# EAGLE board ModbusGateway4GWiFi (EAGLE 9.6.2)
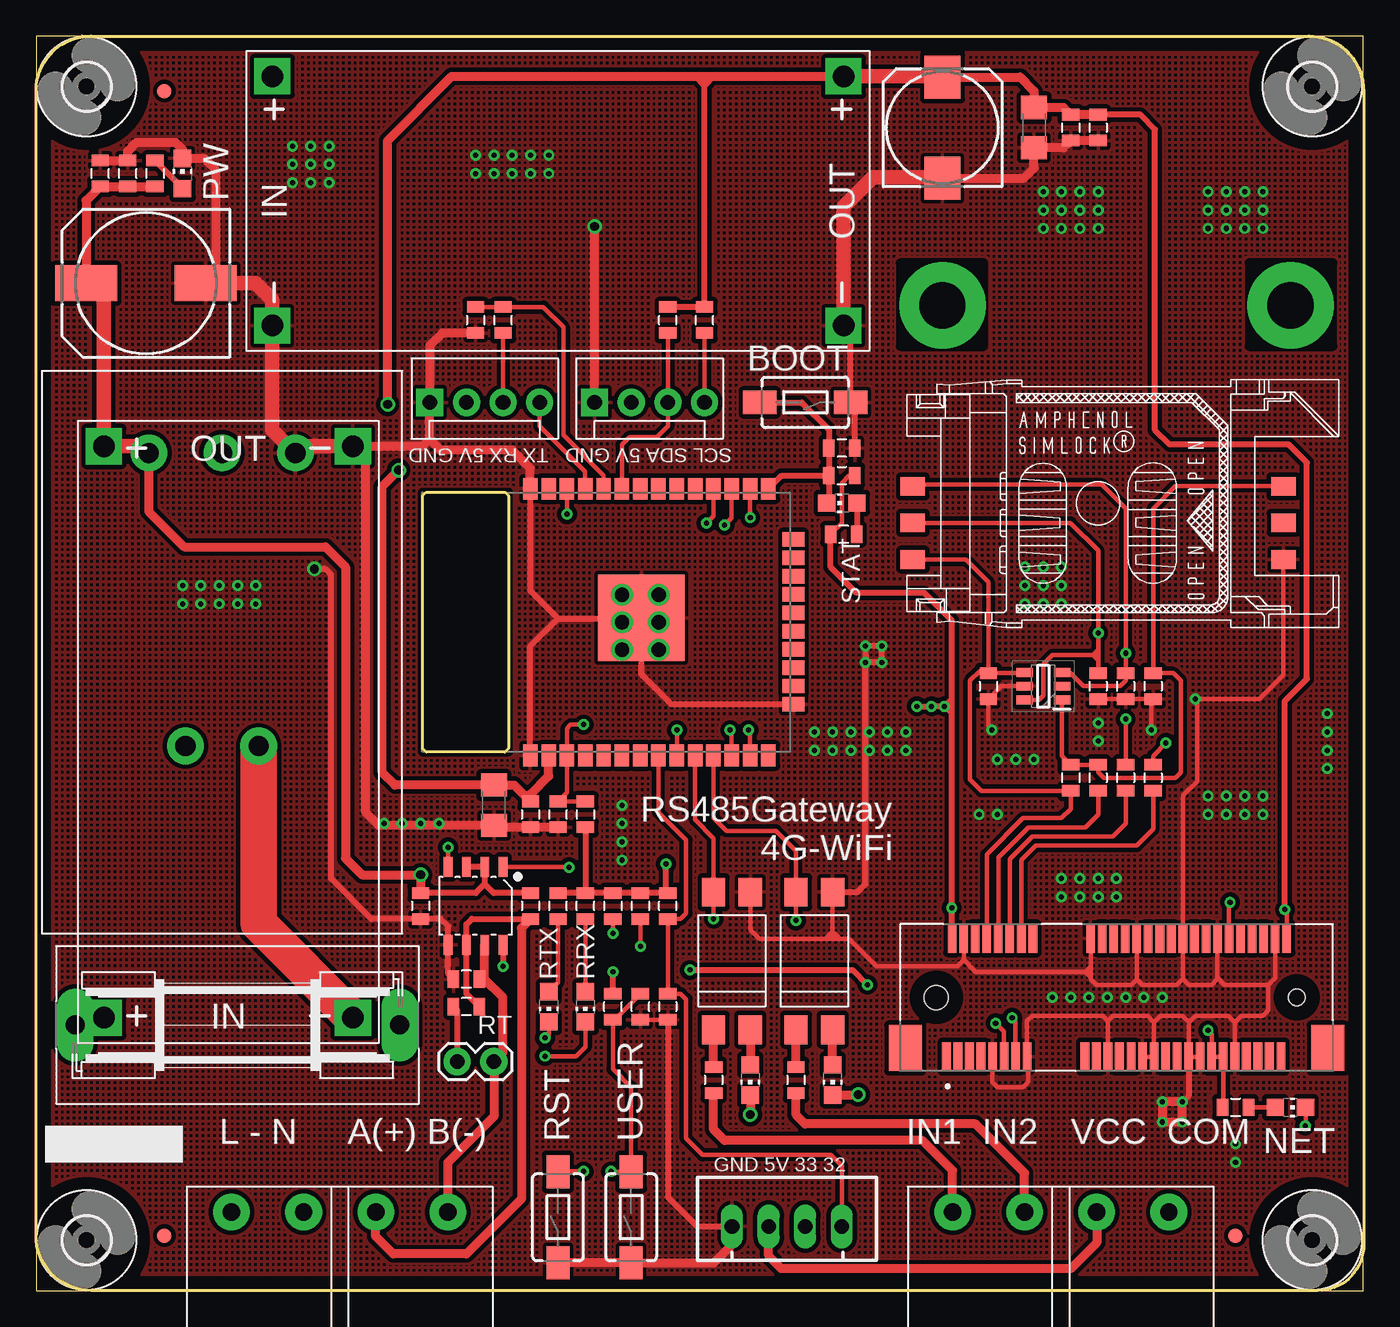
[diagram p0: board, top side]
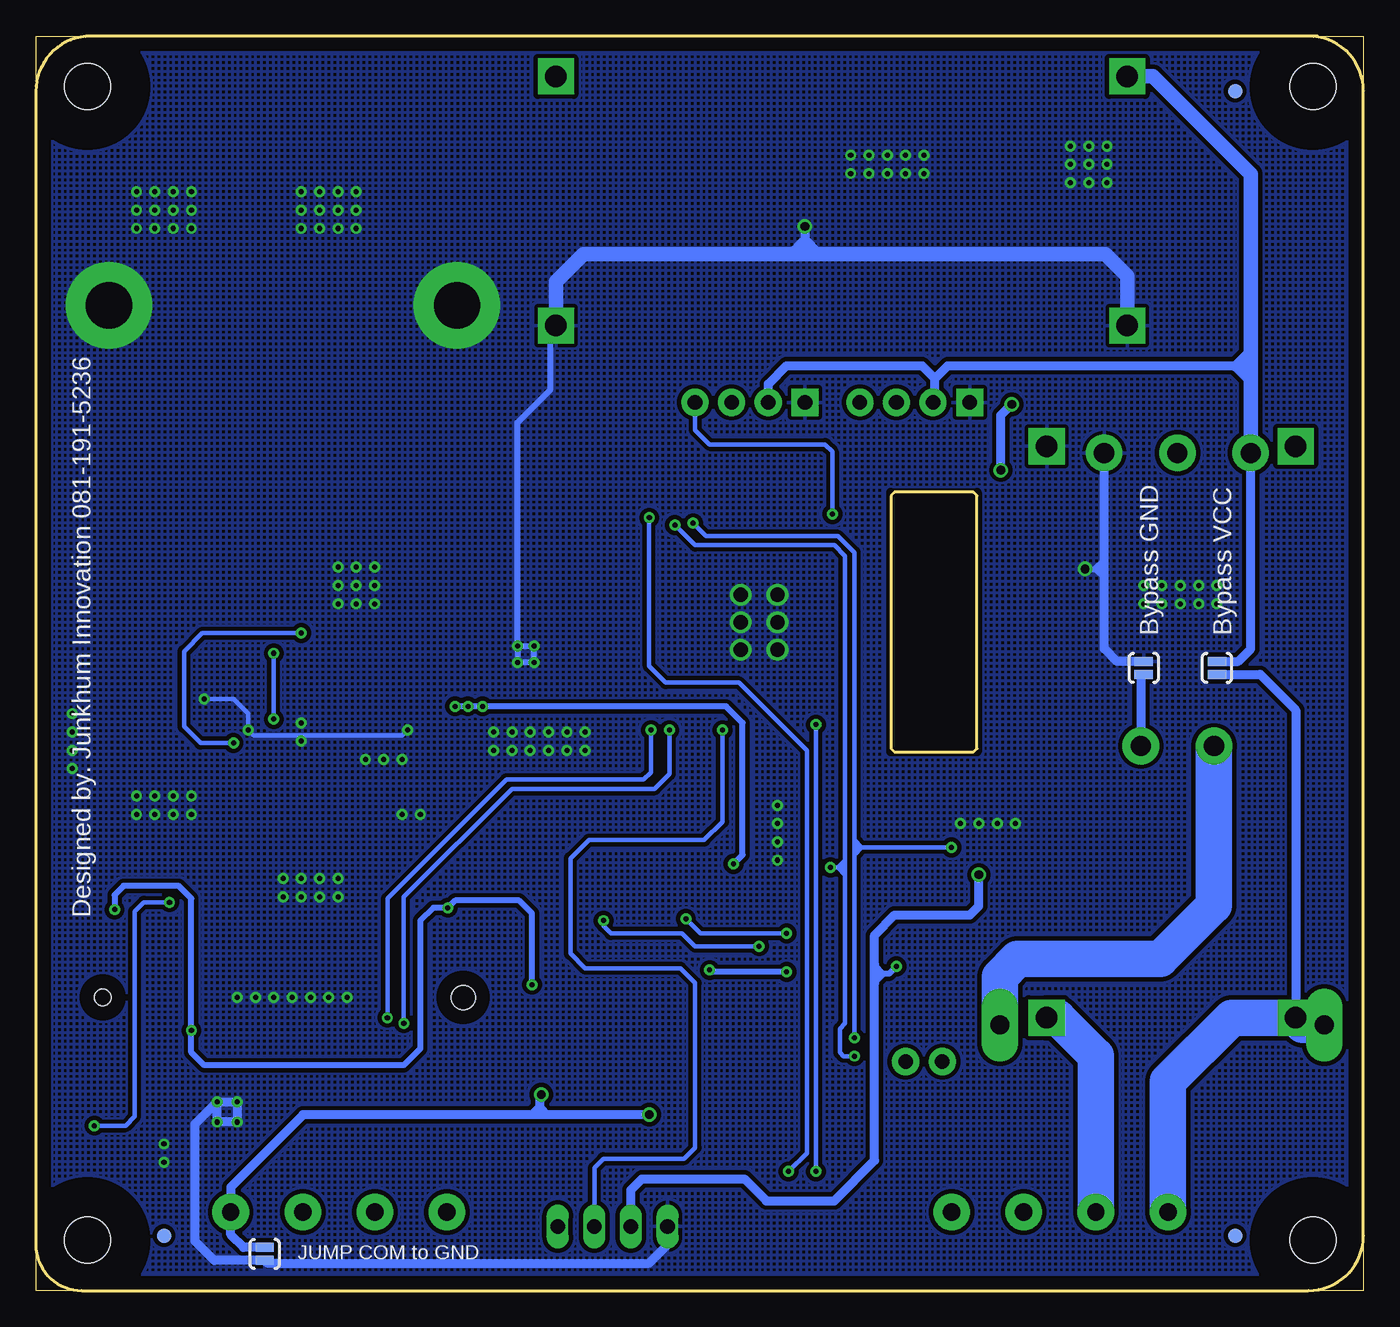
[diagram p1: board, bottom side, seen from below]

Size 92.06 x 87 mm. Coordinates in mm from the lower left corner, seen from the top.
Outline: 0,0 92.06,0 92.06,87 0,87 0,0
Copper layers (1*16): Top 0.035mm / dielectric 1.5mm / Bottom 0.035mm
Design rules "default *": minimum track width 6mil, minimum drill 0.35mm, track to track 6mil, track to pad 6mil, pad to pad 6mil, via to via 6mil, smd to smd 6mil, copper to edge 40mil, drill to drill 6mil, minimum pad ring 10mil, minimum via ring 8mil, stop-mask expansion 4mil, vias tented up to drill 25mil, thermal gap 10mil
Milling: 17 lines

## Footprints (pad centres in the part's own frame; a part is rotated, then mirrored left to right if it is on the bottom)
0805 = smd 0.8 x 1.2: 1 -0.9,0; 2 0.9,0
140CLH-1010 = smd 4.3 x 2.5: + 4.15,0; - -4.15,0
175TMP-0810 = smd 3 x 2.5: + 3.5,0; - -3.5,0
C1206 = smd 1.6 x 1.8: 1 -1.4,0; 2 1.4,0
SH22,5A = drill 1.321 pad 2.54 long: 1 -11.252,0; 2 11.252,0
SOT95P280X145-6N = smd 1.15 x 0.6: 1 -1.3,0.95; 2 -1.3,0; 3 -1.3,-0.95; 4 1.3,-0.95; 5 1.3,0; 6 1.3,0.95
MOLEX_67910-0002 = smd 0.6 x 2: 1 -11.8,-4.1; 2 -11.4,4.1; 3 -11,-4.1; 4 -10.6,4.1; 5 -10.2,-4.1; 6 -9.8,4.1; 7 -9.4,-4.1; 8 -9,4.1; 9 -8.6,-4.1; 10 -8.2,4.1; 11 -7.8,-4.1; 12 -7.4,4.1; 13 -7,-4.1; 14 -6.6,4.1; 15 -6.2,-4.1; 16 -5.8,4.1; 17 -2.2,-4.1; 18 -1.8,4.1; 19 -1.4,-4.1; 20 -1,4.1; 21 -0.6,-4.1; 22 -0.2,4.1; 23 0.2,-4.1; 24 0.6,4.1; 25 1,-4.1; 26 1.4,4.1; 27 1.8,-4.1; 28 2.2,4.1; 29 2.6,-4.1; 30 3,4.1; 31 3.4,-4.1; 32 3.8,4.1; 33 4.2,-4.1; 34 4.6,4.1; 35 5,-4.1; 36 5.4,4.1; 37 5.8,-4.1; 38 6.2,4.1; 39 6.6,-4.1; 40 7,4.1; 41 7.4,-4.1; 42 7.8,4.1; 43 8.2,-4.1; 44 8.6,4.1; 45 9,-4.1; 46 9.4,4.1; 47 9.8,-4.1; 48 10.2,4.1; 49 10.6,-4.1; 50 11,4.1; 51 11.4,-4.1; 52 11.8,4.1 | smd 2.3 x 3.2: S1 -14.65,-3.5; S2 14.65,-3.5 | hole 1.65: -12.5,0 | hole 1.15: 12.5,0
MOLEX-1X4 = drill 1.016 pad 1.88 square: 1 0,0 | drill 1.016 pad 1.88: 2 2.54,0; 3 5.08,0; 4 7.62,0
1X02 = drill 1.016 pad 1.88: 1 0,0; 2 2.54,0
SJ_2S-NO = smd 0.635 x 1.27: 1 -0.45,0; 2 0.45,0
FIDUCIAL-1X2 = smd 1 x 1: 1 0,0
CHIP-LED0805 = smd 1.2 x 1.2: A 0,-1.05; C 0,1.05
DIL4-SMD = smd 1.6 x 2: 1 -1.27,-4.77; 2 1.27,-4.77; 3 1.27,4.77; 4 -1.27,4.77
TACTILE-SWITCH-1101NE = smd 2.3 x 1.6: 1 -3.15,0; 2 3.15,0
ESP-WROOM-32 = smd 1.5 x 1: 1 -9.25,7; 2 -9.25,5.73; 3 -9.25,4.46; 4 -9.25,3.19; 5 -9.25,1.92; 6 -9.25,0.65; 7 -9.25,-0.62; 8 -9.25,-1.89; 9 -9.25,-3.16; 10 -9.25,-4.43; 11 -9.25,-5.7; 12 -9.25,-6.97; 13 -9.25,-8.24; 14 -9.25,-9.51; 25 9.25,-9.51; 26 9.25,-8.24; 27 9.25,-6.97; 28 9.25,-5.7; 29 9.25,-4.43; 30 9.25,-3.16; 31 9.25,-1.89; 32 9.25,-0.62; 33 9.25,0.65; 34 9.25,1.92; 35 9.25,3.19; 36 9.25,4.46; 37 9.25,5.73; 38 9.25,7 | smd 1 x 1.5: 15 -5.7,-11.25; 16 -4.43,-11.25; 17 -3.16,-11.25; 18 -1.89,-11.25; 19 -0.62,-11.25; 20 0.65,-11.25; 21 1.92,-11.25; 22 3.19,-11.25; 23 4.46,-11.25; 24 5.73,-11.25 | smd 6 x 6: GND 0.3,-0.7
HIECUBE = drill 1.4 pad 2.54: P$1 13,15.04; P$2 13,9.96; P$3 33.32,17.58; P$4 33.32,12.5; P$5 33.32,7.42
5EHDRC-2P = drill 1.2 pad 2.54: P$1 3.1,1.75; P$2 8.1,1.75
SOIC8-1.27-5X4MM = smd 0.6 x 1.4: 1 -1.905,-2.7; 2 -0.635,-2.7; 3 0.635,-2.7; 4 1.905,-2.7; 5 1.905,2.7; 6 0.635,2.7; 7 -0.635,2.7; 8 -1.905,2.7
DC-DC-STEP-DOWN-LM2596 = drill 1.5 pad 2.5 square: IN+ -19.812,8.636; IN- -19.812,-8.636; OUT+ 19.812,8.636; OUT- 19.812,-8.636
3,2 = hole 3.2: 0,0
C707_10M006_512_2 = smd 1.7 x 1.3: C1 -12.85,-3.915; C2 -12.85,-1.375; C3 -12.85,1.165; C5 12.85,-3.915; C6 12.85,-1.375; C7 12.85,1.165
JST-XH-04-PACKAGE-LONG-PAD = drill 1.016 long: 1 -3.81,0; 2 -1.27,0; 3 1.27,0; 4 3.81,0

## Placement (x,y rotation side)
C1  33pF  [0805]  73.66,41.91 270 top
C2  0.1  [0805]  6.35,77.47 90 top
C3  1000/10  [140CLH-1010]  7.62,69.85 180 top
C4  0.1uF  [0805]  43.81,19.68 270 top
C5  0.1  [0805]  41.91,19.68 90 top
C6  0.1  [0805]  4.45,77.47 90 top
C7  33pF  [0805]  71.75,80.64 270 top
C8  470uF  [175TMP-0810]  62.87,80.64 90 top
C10  0.1uF  [0805]  26.67,26.67 270 top
C11  0.1  [0805]  34.29,33.02 270 top
C12  0.1  [0805]  36.2,33.02 90 top
C13  0.1  [0805]  55.88,58.42 180 top
C14  10uF  [C1206]  69.22,80.64 270 top
C16  10uF  [C1206]  31.75,33.66 270 top
C17  0.1  [0805]  73.66,80.64 270 top
C20  0.1  [0805]  66.04,41.91 270 top
C22  33pF  [0805]  77.47,41.91 270 top
C23  33pF  [0805]  75.56,41.91 270 top
F1  [SH22,5A]  13.97,18.41 0 top
IC1  DALC208SC6  [SOT95P280X145-6N]  69.85,41.91 180 top
J1  67910-0002  [MOLEX_67910-0002]  74.93,20.32 0 top
J3  TxRx  [MOLEX-1X4]  27.3,61.59 0 top
J4  I2C  [MOLEX-1X4]  38.73,61.59 0 top
JP1  RT  [1X02]  31.75,15.88 180 top
JP4  Bypass GND  [SJ_2S-NO]  15.24,43.18 90 bottom
JP5  Bypass VCC  [SJ_2S-NO]  10.16,43.18 90 bottom
JP8  FIDUCIAL1X2  [FIDUCIAL-1X2]  8.89,83.19 0 top
JP9  FIDUCIAL1X2  [FIDUCIAL-1X2]  8.89,3.81 0 bottom
JP10  FIDUCIAL1X2  [FIDUCIAL-1X2]  83.19,3.81 0 bottom
JP11  FIDUCIAL1X2  [FIDUCIAL-1X2]  8.89,83.19 0 bottom
JP12  FIDUCIAL1X2  [FIDUCIAL-1X2]  8.89,3.81 0 top
JP16  FIDUCIAL1X2  [FIDUCIAL-1X2]  83.19,3.81 0 top
LED2  PW  [CHIP-LED0805]  10.16,77.47 0 top
LED3  NET  [CHIP-LED0805]  87,12.7 270 top
LED4  RRX  [CHIP-LED0805]  38.1,19.68 180 top
LED5  RTX  [CHIP-LED0805]  35.56,19.68 180 top
LED8  STAT  [CHIP-LED0805]  55.88,54.61 90 top
LED13  IN1  [CHIP-LED0805]  49.53,14.61 180 top
LED14  IN2  [CHIP-LED0805]  55.24,14.61 180 top
OK7  PC817  [DIL4-SMD]  48.26,22.86 0 top
OK8  PC817  [DIL4-SMD]  53.98,22.86 0 top
R1  120  [0805]  29.84,19.68 180 top
R2  1k  [0805]  8.26,77.47 270 top
R3  0  [0805]  73.66,35.56 270 top
R4  0  [0805]  75.56,35.56 270 top
R5  56k  [0805]  34.29,26.67 270 top
R6  0  [0805]  77.47,35.56 270 top
R7  330  [0805]  83.19,12.7 0 top
R8  1k  [0805]  32.38,67.31 90 top
R9  15k  [0805]  71.75,35.56 270 top
R10  10k  [0805]  43.81,26.67 90 top
R11  10k  [0805]  40.01,19.68 90 top
R12  56k  [0805]  29.84,21.59 180 top
R13  2k  [0805]  30.48,67.31 270 top
R15  10k  [0805]  38.1,33.02 270 top
R16  10k  [0805]  55.88,56.52 0 top
R20  10k  [0805]  46.35,67.31 90 top
R21  330  [0805]  38.1,26.67 90 top
R22  330  [0805]  36.2,26.67 90 top
R24  10k  [0805]  43.81,67.31 90 top
R36  10k  [0805]  40.01,26.67 270 top
R37  2.2k  [0805]  46.99,14.61 270 top
R38  10k  [0805]  41.91,26.67 270 top
R39  2.2k  [0805]  52.7,14.61 270 top
R73  330  [0805]  56.01,52.45 180 top
S1  USER  [TACTILE-SWITCH-1101NE]  41.27,5.08 90 top
S2  BOOT  [TACTILE-SWITCH-1101NE]  53.34,61.59 180 top
S4  RST  [TACTILE-SWITCH-1101NE]  36.2,5.08 90 top
SJ3  JUMP COM to GND  [SJ_2S-NO]  76.2,2.54 90 bottom
U2  ESP-WROOM-32  [ESP-WROOM-32]  41.27,46.35 90 top
U$1  HIECUBE  [HIECUBE]  25.4,24.77 90 top
U$2  220VAC/12VDC  [5EHDRC-2P]  21.66,7.2 180 top
U$3  In12  [5EHDRC-2P]  71.66,7.2 180 top
U$4  MAX13487  [SOIC8-1.27-5X4MM]  30.48,26.67 180 top
U$5  Com  [5EHDRC-2P]  81.66,7.2 180 top
U$6  DC LM2596 5V  [DC-DC-STEP-DOWN-LM2596]  13.34,38.73 90 top
U$7  DC LM2596 3.3V  [DC-DC-STEP-DOWN-LM2596]  36.2,75.56 0 top
U$8  RS485  [5EHDRC-2P]  31.66,7.2 180 top
U$15  [3,2]  3.5,3.5 0 top
U$16  [3,2]  88.5,3.5 0 top
U$17  [3,2]  88.5,83.5 0 top
U$18  [3,2]  3.5,83.5 0 top
X1  SIMLOCK-C707_10M006_512_2  [C707_10M006_512_2]  73.66,54.61 0 top
X3  Sense  [JST-XH-04-PACKAGE-LONG-PAD]  52.07,4.45 0 top

## Library data of the parts
C1 C2 C4-C7 C10-C13 C17 C20 C22 C23 = SparkFun-Passives
C3 C8 C14 C16 LED13 LED14 = adafruit
F1 = fuse
IC1 = SamacSys_Parts; DESCRIPTION: TVS Diode Array DALC208SC6 Octal, SOT-23 6-Pin; HEIGHT: 1.45mm; MANUFACTURER_NAME: STMicroelectronics; MANUFACTURER_PART_NUMBER: DALC208SC6; MOUSER_PART_NUMBER: 511-DALC208SC6; MOUSER_PRICE-STOCK: https://www.mouser.com/Search/Refine.aspx?Keyword=511-DALC208SC6
J1 = 67910-0002; AVAILABILITY: Warning; DESCRIPTION: 52 Position Female Connector PCI Express Mini Card Gold 0.031 (0.80mm) Black; MF: Molex; MP: 67910-0002; PACKAGE: None; PRICE: None; PURCHASE-URL: https://pricing.snapeda.com/search/part/67910-0002/?ref=eda
J3 J4 = SparkFun-Connectors
JP1 JP8-JP12 JP16 SJ3 = SparkFun
JP4 JP5 = SparkFun-Retired
LED2-LED5 LED8 = led
OK7 OK8 = optocoupler
R1-R13 R15 R16 R20-R22 R24 R36-R39 R73 = SparkFun-Resistors
S1 S2 S4 = SparkFun-Electromechanical; PROD_ID: SWCH-00815
U2 = esp32
U$1 = HICUBE
U$2 U$3 U$5 U$8 = ES-CONNECTOR
U$4 = TCS-MAXIM
U$6 U$7 = diy-modules
U$15-U$18 = holes
X1 = con-amphenol; OC_FARNELL: unknown; OC_NEWARK: unknown
X3 = Rembrandt Electronics - JST XH Connectors v1-0

## Nets
3.3V: C7.1 C8.+ C11.1 C14.1 C16.1 C17.1 J1.2 J1.39 J1.41 J1.52 R7.1 R10.2 R11.2 R15.2 R16.2 R20.2 R21.2 R22.2 R24.2 R36.1 R38.1 R73.2 U2.2 U$7.OUT+
A(+): R1.1 R5.2 U$4.6 U$8.P$2
B(-): JP1.1 R12.1 U$4.7 U$8.P$1
COM: LED13.C LED14.C SJ3.2 U$5.P$1
EN: C12.2 R15.1 S4.2 U2.3
GND: C1.2 C2.2 C3.- C4.2 C5.1 C6.2 C7.2 C8.- C10.2 C11.2 C12.1 C13.1 C14.2 C16.2 C17.2 C20.2 C22.2 C23.2 IC1.5 J1.4 J1.9 J1.15 J1.18 J1.21 J1.26 J1.27 J1.29 J1.34 J1.35 J1.37 J1.40 J1.43 J1.50 J3.1 J4.1 JP4.2 LED2.C OK7.3 OK8.3 R12.2 R13.2 S1.1 S2.1 S4.1 SJ3.1 U2.1 U2.15 U2.38 U2.GND U$1.P$5 U$4.5 U$6.OUT- U$7.IN- U$7.OUT- X1.C5 X3.1
GPIO0: C13.2 LED8.C R16.1 S2.2 U2.25
GPIO2: U2.24
GPIO4: C5.2 R11.1 S1.2 U2.26
GPIO5: U2.29
GPIO12: U2.14
GPIO13: U2.16
GPIO14: J1.13 U2.13
GPIO15: U2.23
GPIO18: U2.30
GPIO19: U2.31
GPIO23: U2.37
GPIO25: OK7.4 R36.2 U2.10
GPIO26: OK8.4 R38.2 U2.11
GPIO27: J1.11 U2.12
GPIO32: C4.1 R10.1 U2.8 X3.4
GPIO33: U2.9 X3.3
GPIO34: U2.6
GPIO35: U2.7
GPIO36: U2.4
GPIO39: U2.5
N$1: JP1.2 R1.2
N$3: J1.10 R3.2
N$5: JP4.1 U$1.P$2 U$2.P$1 U$6.IN-
N$6: LED2.A R2.1
N$7: J1.12 R4.2
N$8: J3.3 R8.1
N$10: J1.14 R6.2
N$14: J1.42 LED3.C
N$15: LED3.A R7.2
N$26: F1.2 U$1.P$1
N$48: LED4.A R21.1
N$49: LED5.A R22.1
N$54: LED8.A R73.1
N$60: OK7.1 R37.1
N$62: LED13.A OK7.2
N$63: OK8.1 R39.1
N$65: LED14.A OK8.2
N$68: R37.2 U$3.P$2
N$71: R39.2 U$3.P$1
RX0: R8.2 R13.1 U2.34
RX2: LED4.C U2.27 U$4.1
S_CLK: C23.1 IC1.3 R4.1 X1.C3
S_DATA: C22.1 IC1.1 R3.1 R9.1 X1.C7
S_RST: C1.1 IC1.6 R6.1 X1.C2
S_VSIM: C20.1 IC1.4 J1.8 R9.2 X1.C1
SCL: J4.4 R20.1 U2.36
SDA: J4.3 R24.1 U2.33
TX0: J3.4 U2.35
TX2: LED5.C U2.28 U$4.4
VCC: C2.1 C3.+ C6.1 C10.1 J3.2 J4.2 JP5.2 R2.2 R5.1 U$1.P$3 U$4.2 U$4.3 U$4.8 U$5.P$2 U$6.OUT+ U$7.IN+ X3.2
VS: F1.1 JP5.1 U$2.P$2 U$6.IN+

## Tracks (layer width: path | path; a pad name or v marks a point on that pad's centre or on a via)
3.3V  (via drill 0.35, 0.6)
  Top 0.305: R73.2 55.88,53.22 55.88,56.01 56.39,56.52 R16.2 | R7.1 82.33,12.74 J1.41 J1.39 81.53,17.78 v81.28,18.03 | J1.52 86.73,26.3 v86.61,26.42
  Top 0.406: R21.2 R36.1 R38.1 R10.2 43.69,27.7 v43.69,29.59 | R21.2 R22.2 | R24.2 R20.2 46.35,83.57 | v86.61,26.42 86.61,40.89 88.14,42.42 88.14,57.4 86.87,58.67 78.61,58.67 77.6,59.69 77.6,80.52 76.57,81.55 C17.1 | J1.2 63.53,26.51 v63.5,26.54 63.5,40.01 | R11.2 v40.01,22.1 | v45.34,22.23 56.64,22.23 v57.66,21.21 | 63.5,40.01 63.5,40.64 | 63.5,40.64 63.5,41.02 | 63.5,41.02 63.5,46.48 61.59,48.39 56.9,48.39 55.11,50.18 R73.2 | v61.09,40.51 v62.1,40.51 v62.99,40.51 | v62.99,40.51 63.12,40.64 63.5,40.64 | v62.99,40.51 63.5,41.02 | v62.99,40.51 63.5,40.01 | R15.2 R21.2 | 46.23,84.2 46.35,84.07 46.35,83.57 | 45.72,84.2 46.35,83.57 | 46.35,83.57 46.99,84.2
  Top 0.61: U2.2 35.55,35.67 34.29,34.42 C11.1 33.16,35.05 C16.1 24.89,35.05 24,35.94 24,55.75 v25.15,56.9 | C17.1 C7.1 71.25,82.05 C14.1 69.22,83.19 68.25,84.14 C8.+ | v24.38,61.47 24.38,79.76 28.83,84.2 45.72,84.2 46.23,84.2 46.99,84.2 U$7.OUT+
  Top 1.016: U$7.OUT+ 62.81,84.2 C8.+
  Bottom 0.406: v86.61,26.42 86.61,27.43 85.98,28.07 82.17,28.07 81.28,27.18 v81.28,18.03 81.28,16.51 80.39,15.62 66.55,15.62 65.41,16.76 65.41,25.65 64.52,26.54 v63.5,26.54 62.99,27.05 58.55,27.05 57.66,26.16 v57.66,21.21 | v40.01,22.1 45.21,22.1 v45.34,22.23 | v43.69,29.59 43.05,30.23 43.05,39.37 44.2,40.51 v61.09,40.51 v62.1,40.51 v62.99,40.51
  Bottom 0.61: v25.15,56.9 25.15,60.71 v24.38,61.47
A(+)
  Top 0.406: R5.2 30.23,25.78 29.84,25.4 U$4.6 29.84,20.59 R1.1
  Top 0.61: R5.2 33.66,25.14 33.66,6.35 29.84,2.54 24.77,2.54 23.56,3.75 U$8.P$2
B(-)
  Top 0.406: JP1.1 32,16.13
  Top 0.61: U$8.P$1 28.56,8.87 31.75,12.06 JP1.1 32.38,16.51 32.38,20.32 31.11,21.59 | 31.11,21.59 U$4.7 | R12.1 31.11,21.59
COM  (via drill 0.6)
  Top 0.61: LED13.C v49.53,12.19 | LED14.C 56.99,13.55 v57.02,13.59
  Bottom 0.61: v49.53,12.19 56.64,12.19 | 56.64,12.19 57.15,12.19 | 57.15,12.19 57.66,12.19 | SJ3.2 77.67,2.99 78.56,3.88 U$5.P$1 78.56,7.17 73.53,12.19 57.78,12.19 57.66,12.19 | v57.02,13.59 57.15,13.46 57.15,12.7 | 57.15,12.7 57.15,12.19 | 57.15,12.7 56.64,12.19 | 57.15,12.7 57.66,12.19
EN  (via drill 0.35)
  Top 0.305: R15.1 C12.2 36.81,34.54 U2.3 36.81,38.97 37.08,39.24 v37.97,39.24 | S4.2 36.22,8.26 v37.97,8.26
  Bottom 0.305: v37.97,8.26 v37.97,39.24
GND  (via drill 0.35, 0.6, 1, 3.2 pad 6)
  Top 0.305: J1.43 83.13,18.6 | 79.93,18.59 J1.35 J1.37 | 83.13,18.6 82.68,19.05 80.39,19.05 79.93,18.59 | J1.27 J1.29 77.53,18.61 | J1.21 74.33,18.7 | 74.33,18.7 74.68,19.05 77.09,19.05 77.53,18.61 | J1.9 66.33,14.44 66.67,14.1 68.45,14.1 68.83,14.48 68.83,16.12 J1.15 68.73,18.69 69.09,19.05 73.98,19.05 74.33,18.7 | 72.77,22.1 65.15,22.1 64.33,22.92 J1.4 64.33,22.93 63.88,22.48 58.29,22.48 56.39,24.38 55.75,24.38 | 73.15,22.1 72.77,22.1 | 73.15,21.72 73.15,21.59 73.53,21.21 75.95,21.21 76.33,21.59 | 73.15,21.72 73.15,22.1 | 73.15,22.1 73.15,22.48 | 73.15,22.48 73.15,24.4 J1.18 | J1.26 76.33,21.59 | 76.33,21.59 76.71,21.21 79.12,21.21 79.53,21.62 | 79.53,21.62 J1.34 79.53,34.32 80.52,35.31 80.52,41.02 | J1.40 81.93,21.7 | 81.93,21.7 82.42,21.21 85.47,21.21 | J1.50 85.93,21.67 85.47,21.21 | C1.2 C23.2 77.09,41.01 | 77.09,41.01 C22.2 | 81.93,21.7 81.93,21.61 81.53,21.21 79.94,21.21 79.53,21.62 | 79.93,18.59 79.93,18.62 79.5,19.05 77.97,19.05 77.53,18.61 | C5.1 C4.2 | 73.15,22.48 72.77,22.1 | 72.77,22.1 73.15,21.72 | 83.13,18.6 83.58,19.05 85.09,19.05 85.47,19.43 85.47,21.21 | OK7.3 49.53,25.02 50.16,24.38 54.74,24.38 | 55.75,24.38 55.24,24.38 | 55.24,24.38 54.74,24.38 | OK8.3 55.24,24.89 | 55.24,24.89 55.24,24.38 | 55.24,24.89 54.74,24.38 | 55.24,24.89 55.75,24.38 | IC1.5 66.94,41.91 C20.2 66.04,39.12 v66.29,38.86 | X1.C5 86.51,42.7 84.84,41.02 80.52,41.02 | 80.52,41.02 v80.39,41.02 | v77.34,38.86 77.34,40.76 77.09,41.01
  Top 0.406: R12.2 28.57,21.96 U$4.5 28.57,25.27 28.07,25.78 26.68,25.78 C10.2 23.25,25.77 20.45,28.57 20.45,49.66 20.07,50.04 v19.3,50.04 | C13.1 56.78,61.3 S2.1 56.49,66.45 U$7.OUT- | U2.15 44.05,40.66 41.98,42.73 U2.GND 41.93,46.61 36.2,46.61 | U2.38 34.27,48.53 36.2,46.61 | U2.1 34.27,44.69 36.2,46.61 | OK8.3 56.97,27.63 57.53,28.19 v57.53,43.56 | v57.53,43.56 v57.53,44.7 v58.67,44.7 v58.67,43.56 v57.53,43.56 | C4.2 43.81,6.48 45.85,4.45 X3.1 | J1.35 79.93,13.51 v79.5,13.08
  Top 0.61: C12.1 C11.2 31.89,32.12 C16.2 23.75,32.26 22.86,33.15 22.86,57.66 U$6.OUT- 26.8,58.55 27.3,59.05 | C6.2 C2.2 6.35,78.99 6.99,79.63 9.65,79.63 10.16,79.12 LED2.C 11.65,78.52 12.45,77.72 12.45,69.98 12.32,69.85 | C17.2 C7.2 71.25,79.25 C14.2 69.22,77.85 68.51,77.14 C8.- | X3.1 48.26,3.17 46.99,1.91 41.3,1.91 S1.1 S4.1 | U2.38 34.27,57.04 33.02,58.29 28.07,58.29 27.3,59.05 | 27.3,59.05 J3.1 27.3,65.53 28.18,66.41 R13.2 | J4.1 v38.73,73.79 | v78.11,13.08 v78.11,11.68 v79.5,11.68 v79.5,13.08 v78.11,13.08
  Top 1.016: U$6.OUT- 18.44,58.55 U$1.P$5 16.38,59.68 U$7.IN- 16.38,68.71 15.24,69.85 12.32,69.85 C3.- | U$7.OUT- 56.01,75.18 58.04,77.22 62.79,77.22 C8.-
  Bottom 0.305: v80.39,41.02 78.36,41.02 77.34,40.01 v77.34,38.86 76.96,38.48 66.67,38.48 v66.29,38.86
  Bottom 0.406: 18.61,50.04 17.98,50.04 | v19.3,50.04 18.61,50.04 | 18.61,50.04 17.98,50.67 | 18.61,50.04 17.98,49.4 | v58.67,44.7 v57.53,44.7 | 57.53,44.58 v57.53,43.56 v58.67,43.56 v58.67,44.7 | v58.67,44.7 58.67,60.2 56.39,62.48 56.39,66.55 U$7.OUT-
  Bottom 0.61: JP4.2 17.09,43.63 17.98,44.52 17.98,49.4 17.98,50.04 17.98,50.67 U$1.P$5 | X3.1 48.26,3.17 49.53,1.91 76.02,1.91 SJ3.1 79.69,2.09 81.03,3.43 81.03,11.56 v79.5,13.08 | 38.73,72.77 38.73,71.88 | v38.73,73.79 38.73,72.9 | 38.73,72.9 38.73,72.77 | 38.73,72.9 37.72,71.88 | 38.73,72.77 38.86,72.77 39.75,71.88 | v79.5,13.08 v78.11,13.08 v78.11,11.68 v79.5,11.68 v79.5,13.08
  Bottom 1.016: U$7.OUT- 56.01,69.98 54.1,71.88 39.75,71.88 38.73,71.88 37.72,71.88 17.91,71.88 16.38,70.36 U$7.IN-
  other vias: 62.87,68.33 87,68.33 40.64,48.26 40.64,46.35 40.64,44.45 43.18,44.45 43.18,46.35 43.18,48.26 69.85,76.2 71.12,76.2 72.39,76.2 73.66,76.2 73.66,74.93 73.66,73.66 72.39,73.66 72.39,74.93 71.12,74.93 71.12,73.66 69.85,73.66 69.85,74.93 81.28,76.2 82.55,76.2 83.82,76.2 85.09,76.2 85.09,74.93 85.09,73.66 83.82,73.66 82.55,73.66 81.28,73.66 81.28,74.93 82.55,74.93 83.82,74.93 30.48,78.74 31.75,78.74 33.02,78.74 34.29,78.74 35.56,78.74 35.56,77.47 34.29,77.47 33.02,77.47 31.75,77.47 30.48,77.47 17.78,79.38 19.05,79.38 20.32,79.38 20.32,78.11 20.32,76.83 19.05,76.83 19.05,78.11 17.78,78.11 17.78,76.83 81.28,34.29 82.55,34.29 83.82,34.29 85.09,34.29 85.09,33.02 83.82,33.02 82.55,33.02 81.28,33.02 89.53,40.01 89.53,38.73 89.53,37.47 89.53,36.2 70.48,20.32 71.75,20.32 73.03,20.32 74.3,20.32 75.56,20.32 76.83,20.32 78.11,20.32 83.19,10.16 83.19,8.89 10.16,47.62 11.43,47.62 12.7,47.62 13.97,47.62 15.24,47.62 15.24,48.9 13.97,48.9 12.7,48.9 11.43,48.9 10.16,48.9 24.13,32.38 25.4,32.38 26.67,32.38 27.94,32.38 40.64,33.66 40.64,32.38 40.64,31.11 40.64,29.84 53.98,38.73 53.98,37.47 55.24,37.47 55.24,38.73 56.52,38.73 56.52,37.47 57.78,37.47 59.05,37.47 60.33,37.47 60.33,38.73 59.05,38.73 57.78,38.73 66.67,36.83 67.94,36.83 69.22,36.83 71.12,28.57 71.12,27.3 72.39,27.3 72.39,28.57 73.66,28.57 73.66,27.3 74.93,27.3 74.93,28.57 65.41,33.02 66.67,33.02 73.66,39.37 73.66,38.1 68.58,50.16 69.85,50.16 71.12,50.16 71.12,48.9 69.85,48.9 68.58,48.9 68.58,47.62 69.85,47.62 71.12,47.62
  pour Bottom (isolate 0.305, hatched): 0,87 92.08,87 92.08,0 0,0
  pour Top (isolate 0.305, hatched): 0,87 92.08,87 92.08,0 0,0
GPIO0
  Top 0.406: R16.1 C13.2 54.98,59.7 53.09,61.59 S2.2 | R16.1 54.98,54.76 LED8.C | U2.25 51.7,56.52 R16.1
GPIO4  (via drill 0.35)
  Top 0.305: C5.2 40.11,18.79 R11.1 40.01,15.37 41.27,14.1 S1.2 39.9,8.23 v39.88,8.26 | v49.53,53.59 49.52,53.61 U2.26
  Bottom 0.305: v39.88,8.26 38.61,9.53 38.61,37.47 43.31,42.16 48.39,42.16 49.53,43.31 v49.53,53.59
GPIO14  (via drill 0.35)
  Top 0.305: J1.13 67.93,18.68 v67.69,18.92 | v49.4,38.86 49.52,38.75 U2.13
  Bottom 0.305: v67.69,18.92 67.69,27.18 59.44,35.43 49.91,35.43 49.4,35.94 v49.4,38.86
GPIO25  (via drill 0.35)
  Top 0.305: v46.99,25.78 OK7.4 46.99,31.37 45.7,32.65 U2.10 | v40.01,24.77 R36.2
  Bottom 0.305: v46.99,25.78 45.97,24.77 v40.01,24.77
GPIO26  (via drill 0.35)
  Top 0.305: U2.11 46.98,32.78 47.88,31.88 51.31,31.88 52.7,30.48 OK8.4 v52.7,25.65 | R38.2 v41.91,23.88
  Bottom 0.305: v41.91,23.88 46.35,23.88 47.24,24.77 52.2,24.77 52.7,25.27 v52.7,25.65
GPIO27  (via drill 0.35)
  Top 0.305: J1.11 67.13,17.96 v66.55,18.54 | v48.13,38.86 48.24,38.75 U2.12
  Bottom 0.305: v66.55,18.54 66.55,27.3 59.05,34.8 49.15,34.8 48.13,35.81 v48.13,38.86
GPIO32
  Top 0.305: X3.4 55.88,8.64 55.12,9.4 46.23,9.4 45.09,10.54 45.09,20.19 44.69,20.59 C4.1 R10.1 44.69,25.77 45.09,26.16 45.09,31.24 43.16,33.16 U2.8
GPIO33  (via drill 0.35)
  Top 0.305: v44.45,38.86 44.45,37.12 U2.9
  Bottom 0.305: X3.3 53.34,8.51 52.7,9.14 47.12,9.14 46.35,9.91 46.35,21.34 47.37,22.35 53.98,22.35 54.99,23.37 54.99,29.97 53.72,31.24 45.72,31.24 44.45,32.51 v44.45,38.86
N$1
  Top 0.406: R1.2 29.21,19.42 JP1.2
N$3
  Top 0.305: J1.10 66.73,30.03 68.83,32.13 72.77,32.13 73.66,33.02 R3.2
N$5
  Top 2.54: U$6.IN- 15.44,25.45 U$1.P$2
  Bottom 0.61: JP4.1 15.44,42.53 U$1.P$2
  Bottom 2.54: U$2.P$1 18.56,16.27 21.21,18.92 U$6.IN-
N$6
  Top 0.406: R2.1 10.16,76.47 LED2.A
N$7
  Top 0.305: J1.12 67.53,29.94 69.09,31.5 74.68,31.5 75.56,32.38 R4.2
N$8
  Top 0.305: R8.1 J3.3
N$10
  Top 0.305: J1.14 68.33,29.85 69.34,30.86 76.33,30.86 77.47,32 R6.2
N$14  (via drill 0.35)
  Top 0.305: LED3.C 88.05,11.46 v88.01,11.43 | J1.42 82.73,26.85 v82.8,26.92
  Bottom 0.305: v88.01,11.43 85.85,11.43 85.22,12.06 85.22,26.29 84.58,26.92 v82.8,26.92
N$15
  Top 0.305: R7.2 LED3.A
N$26
  Bottom 2.54: F1.2 25.22,21.77 24,22.99 14.1,22.99 10.36,26.72 U$1.P$1
N$48
  Top 0.305: R21.1 LED4.A
N$49
  Top 0.305: R22.1 36.2,21.37 LED5.A
N$54
  Top 0.406: LED8.A 56.93,52.47 R73.1
N$60
  Top 0.61: R37.1 OK7.1
N$62
  Top 0.61: OK7.2 LED13.A
N$63
  Top 0.61: R39.1 OK8.1
N$65
  Top 0.61: LED14.A OK8.2
N$68
  Top 0.61: U$3.P$2 63.56,8.33 61.47,10.41 47.75,10.41 46.99,11.18 R37.2
N$71
  Top 0.61: U$3.P$1 68.56,8.15 65.15,11.56 53.34,11.56 52.7,12.19 R39.2
RX0
  Top 0.305: R13.1 R8.2 35.17,68.21 36.58,66.8 36.58,59.31 39.35,56.53 U2.34
RX2  (via drill 0.35)
  Top 0.305: LED4.C 38.1,16.89 37.47,16.26 v35.31,16.26 | v47.75,53.09 48.24,53.58 U2.27 | U$4.1 36.92,29.37 v36.96,29.34
  Bottom 0.305: v35.31,16.26 36.07,16.26 36.32,16.51 36.32,18.16 35.94,18.54 35.94,28.83 | v47.75,53.09 46.35,51.69 36.7,51.69 35.94,50.93 35.94,29.84 | 35.94,28.83 35.94,29.34 | 35.94,29.34 35.94,29.84 | 36.45,29.34 35.94,29.34 | v36.96,29.34 36.45,29.34 | 35.94,29.84 36.45,29.34 | 36.45,29.34 35.94,28.83
S_CLK  (via drill 0.35)
  Top 0.305: X1.C3 60.91,55.88 73.91,55.88 75.56,54.23 v75.56,44.2 C23.1 75.56,42.29 75.18,41.91 72.64,41.91 71.69,42.86 IC1.3 | R4.1 v75.56,39.62
  Bottom 0.305: v75.56,39.62 v75.56,44.2
S_DATA
  Top 0.305: X1.C7 79.02,55.77 77.47,54.23 C22.1 78.86,42.81 79.38,42.29 79.38,35.94 78.99,35.56 74.04,35.56 73.66,35.94 R3.1 R9.1 71.15,37.06 IC1.1
S_RST  (via drill 0.35)
  Top 0.305: C1.1 73.66,43.69 | 73.66,43.69 73.66,44.07 | 73.66,44.07 73.66,44.45 | 73.66,44.45 v73.66,45.59 73.66,51.31 71.73,53.23 X1.C2 | IC1.6 69.53,40.96 69.85,41.27 69.85,43.43 70.48,44.07 73.28,44.07 | 73.28,44.07 73.66,44.07 | 73.66,44.45 73.28,44.07 | 73.28,44.07 73.66,43.69 | R6.1 77.47,37.08 v78.36,37.97
  Bottom 0.305: v78.36,37.97 80.64,37.97 81.79,39.12 81.79,44.32 80.52,45.59 v73.66,45.59
S_VSIM
  Top 0.305: J1.8 65.93,30.24 68.45,32.77 71.12,32.77 71.75,33.4 R9.2 65.54,34.66 64.77,35.43 64.77,42.29 65.41,42.93 66.04,42.93 | X1.C1 64.49,50.7 66.04,49.15 66.04,42.93 | 66.04,42.93 C20.1 68.5,42.81 IC1.4
SCL  (via drill 0.35)
  Top 0.305: R20.1 J4.4 | v36.83,53.85 36.81,53.86 U2.36
  Bottom 0.305: J4.4 46.35,59.69 45.34,58.67 37.34,58.67 36.83,58.17 v36.83,53.85
SDA
  Top 0.305: R24.1 J4.3 43.81,59.94 43.05,59.18 41.15,59.18 40.62,58.66 U2.33
TX0
  Top 0.305: J3.4 34.92,59.94 38.09,56.78 U2.35
TX2  (via drill 0.35)
  Top 0.305: LED5.C 35.56,17.78 v35.31,17.53 | v46.48,53.21 46.98,53.71 U2.28 | U$4.4 v28.57,30.73
  Bottom 0.305: v35.31,17.53 35.31,30.23 | 35.31,30.23 35.31,30.73 | 35.31,30.73 35.31,31.24 | 35.31,31.24 35.31,51.18 36.45,52.32 45.59,52.32 v46.48,53.21 | v28.57,30.73 34.29,30.73 34.8,30.73 | 34.8,30.73 35.31,30.73 | 34.8,30.73 35.31,31.24 | 34.8,30.73 35.31,30.23
VCC  (via drill 0.35, 0.6)
  Top 0.406: U$4.3 U$4.2 31.11,28.19 | R5.1 31.74,27.57 31.11,28.19 | 31.11,28.19 30.49,27.57 C10.1 | U$4.8 v32.38,22.48
  Top 0.61: R2.2 C2.1 C6.1 3.47,75.59 C3.+ | U$5.P$2 73.56,3.33 71.75,1.52 51.69,1.52 50.8,2.41 X3.2 | C10.1 v26.67,28.83 22.61,28.83 21.46,29.97 21.46,50.16 20.07,51.56 10.29,51.56 7.82,54.03 U$1.P$3
  Top 1.016: U$1.P$3 7.36,58.55 U$6.OUT+ 4.7,69.47 4.32,69.85 C3.+
  Bottom 0.406: v32.38,22.48 32.89,21.97 33.27,21.97 | 33.27,21.97 33.91,21.97 | 33.91,22.61 33.27,21.97 | 33.27,21.97 33.91,21.34
  Bottom 0.61: JP5.2 8.69,43.63 7.82,44.5 U$1.P$3 | J4.2 41.27,62.87 40.01,64.14 30.61,64.14 29.72,63.25 | 29.72,63.25 29.72,61.72 J3.2 | 29.72,63.25 28.83,64.14 8.89,64.14 | 7.82,64.26 7.95,64.14 8.89,64.14 | 8.89,64.14 7.87,65.15 7.82,65.15 | 8.89,64.14 8.89,64.06 7.82,62.99 | X3.2 50.8,6.99 50.04,7.75 42.93,7.75 41.4,6.22 36.7,6.22 33.91,9.02 33.91,21.34 33.91,21.97 33.91,22.61 33.91,24.64 32.51,26.04 27.3,26.04 26.67,26.67 v26.67,28.83
  Bottom 1.016: U$1.P$3 7.82,62.99 7.82,64.26 7.82,65.15 7.82,77.42 14.61,84.2 U$7.IN+
VS
  Bottom 0.61: JP5.1 7.17,42.73 4.7,40.26 U$6.IN+
  Bottom 2.54: U$2.P$2 13.56,14.51 9.14,18.92 U$6.IN+ 4.19,18.41 F1.1

## Text on the board
tNames: TX RX 5V GND | SCL SDA 5V GND | RS485Gateway / 4G-WiFi | L - N | A(+) B(-) | IN1 IN2 | VCC COM | GND 5V 33 32
bNames: Designed by. Junkhum Innovation 081-191-5236